# Altium PCB PCB1.PcbDoc (part 1 of 2)
Units mil, origin at the board's own origin, x right, y up, seen from the top; angles counter-clockwise.
Board outline 2301.37 x 4029.64 mil, 2 copper layers (Top Layer, Bottom Layer); 103 components, 112 nets, 474 pads, 173 vias.
Unrouted connection lines stored in the file: 1.
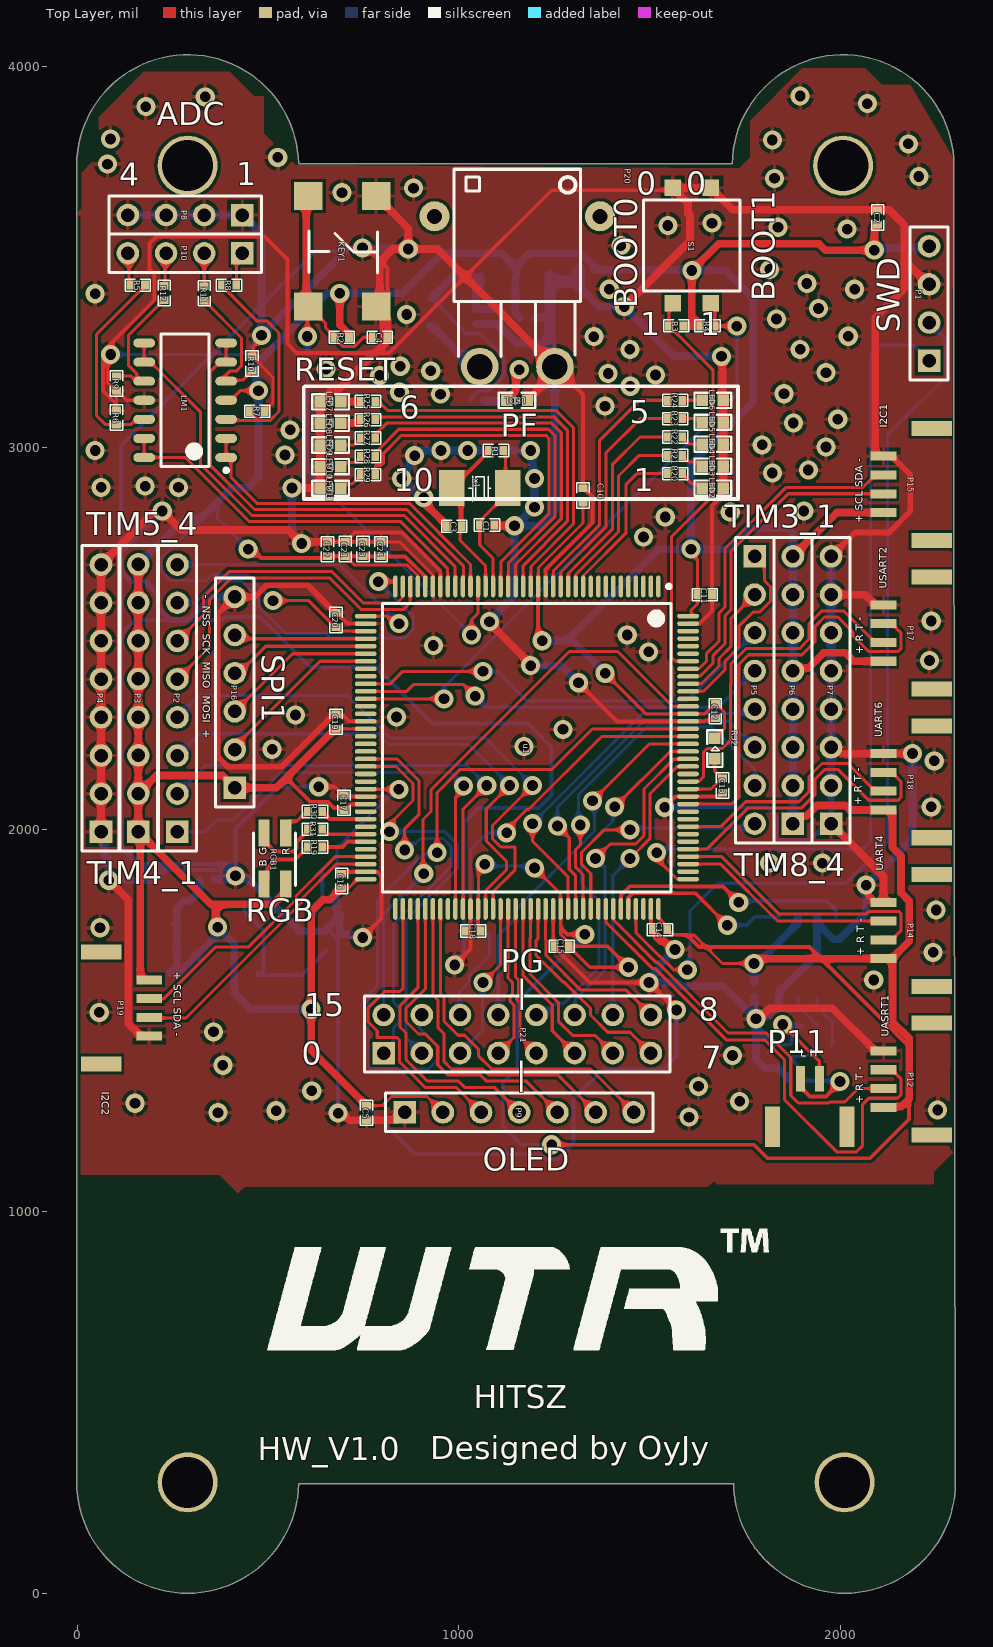
[diagram p0: Top Layer view]
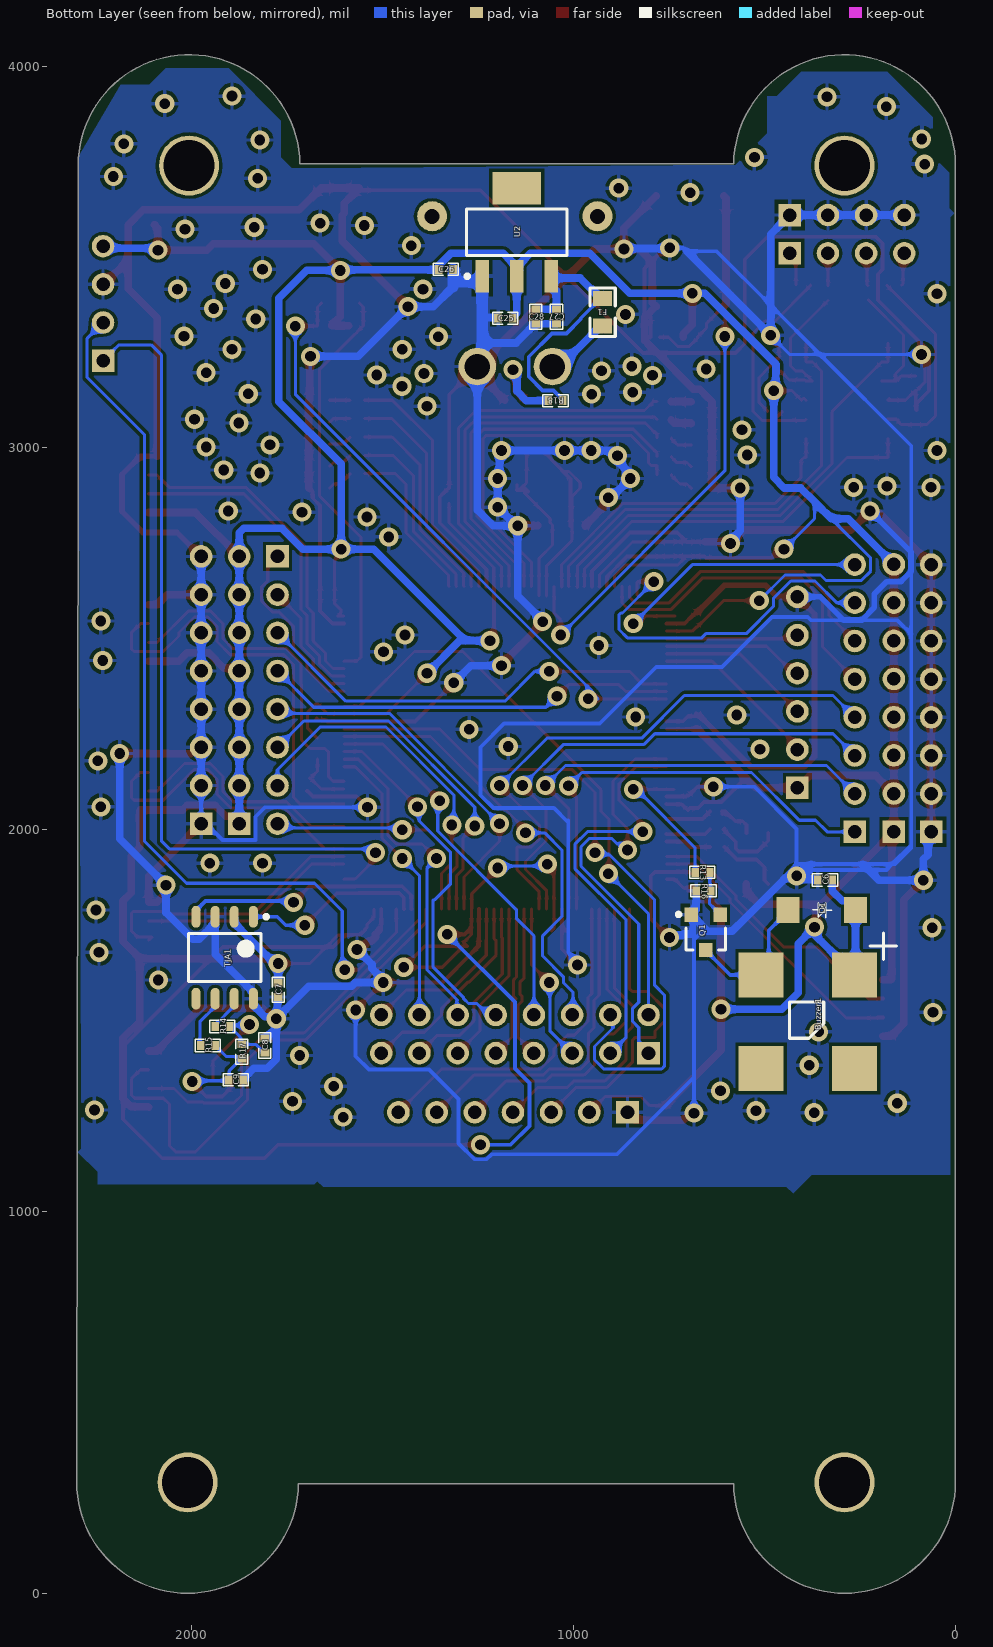
[diagram p1: Bottom Layer view, seen from below]

## Layer stack, top to bottom
Top Solder: solder mask 0.4, Solder Resist, Dk 3.5
Top Layer: signal copper 1.4
Dielectric 1: dielectric 12.6, FR-4, Dk 4.8
Bottom Layer: signal copper 1.4
Bottom Solder: solder mask 0.4, Solder Resist, Dk 3.5

## Board outline
-0.83,3739.27 cw(c289.61,3739.27) 580.02,3744.28 1715.74,3744.28 cw(c2006.15,3739.27) 2296.6,3739.27 2296.6,3046.36 2300.53,290.46 cw(c2295.52,290.45) 2300.53,290.45 cw(c2010.09,290.45) 2010.09,0 cw(c2010.09,290.45) 1719.67,286.37 580.03,286.37 cw(c289.61,290.45) 289.61,0 cw(c289.61,290.45) -0.83,290.45 cw(c4.18,290.45) -0.43,292.42 cw(c4.18,294.39) -0.83,294.39

## Design rules (kind name [scope] priority, off if disabled: settings)
Clearance [All] p1: gap=8 ignorepadtopadclearanceinfootprint=TRUE except(0: Arc-Hole Track-Hole SMDPad-Hole THPad-Hole Via-Hole Fill-Hole Poly-Hole Region-Hole Text-Hole)
ComponentClearance [All] p1 off: gap=10 collisioncheckmode=3 verticalgap=10 showdistances=FALSE
MinimumSolderMaskSliver [All] p1: minsoldermaskwidth=0
PolygonConnect [All] p1: connectstyle=Relief reliefconductorwidth=10 reliefentries=4 polygonreliefangle="90 Angle" airgapwidth=10
RoutingVias [All] p1: holewidth=28 width=50 viastyle="Through Hole" minholewidth=28 minwidth=50 maxholewidth=28 maxwidth=50
SilkToSilkClearance [All] p1: silktosilkclearance=0
SilkToSolderMaskClearance [IsPad] p1: minsilkscreentomaskgap=0 clearancetoexposedcopper=TRUE
SolderMaskExpansion [All] p1: expansion=4
Width [All] p1: maxlimit=100 minlimit=8 preferedwidth=10 minimp=50.000000 maximp=50.000000 favimp=50.000000
26 further rules are at their usual default settings.

## Classes and differential pairs
component class Sheet4: Buzzer1 C6 C7 C8 C9 C10 C11 C12 C13 C14 C15 C16 C17 C18 C19 C20 C21 C22 C23 C24 C25 C26 C27 C28 D1 F1 LED1 LED2 LED3 LED4 LED5 LED6 LED7 LED8 LED9 LED10 LED11 P11 P12 P14 P15 P16 P17 P18 P19 P20 P21 Q1 R13 R14 R15 R16 R17 R18 R19 R20 R21 R22 R23 R24 R25 R26 R27 R28 R29 R30 R31 R32 RGB1 TJA1 U2
component class Sheet3: C1 C2 C3 C4 C5 KEY1 LM1 P1 P2 P3 P4 P5 P6 P7 P8 P9 P10 R1 R2 R3 R4 R5 R6 R7 R8 R9 R10 R11 R12 S1 u1 x1

## Components (designator, comment, footprint, x,y, rotation, side; value= is the part's Value field where it differs from the comment)
Buzzer1 "Buzzer" BUZZER 218,1329.66 r90 bottom
C1 "20PF" 0402 1073.57,2797.73 r0 top
C2 "0.1uf" 0402 2096.7,3603.14 r270 top
C3 "20PF" 0402 988,2794.66 r180 top
C4 "1uf" 0402 793,3289.66 r0 top
C5 "0.1uf" 0402 758,1258.24 r90 top
C6 "10uf" 0402 340.5,1868.28 r180 bottom
C7 "0.1uf" 0402 1772.9,1580.66 r270 bottom
C8 "30pf" 0402 1808,1434.66 r270 bottom
C9 "30pf" 0402 1884,1344.66 r0 bottom
C10 "0.1uf" 0402 1324.91,2875.12 r270 top
C11 "0.1uf" 0402 1644,2615.61 r180 top
C12 "0.1uf" 0402 1671.75,2310.39 r90 top
C13 "0.1uf" 0402 1690.21,2115.66 r90 top
C14 "0.1uf" 0402 1526.87,1738.19 r0 top
C15 "0.1uf" 0402 1269,1694.66 r0 top
C16 "0.1uf" 0402 693,1865.66 r270 top
C17 "0.1uf" 0402 699.31,2070.66 r270 top
C18 "0.1uf" 0402 1037.54,1734.66 r0 top
C19 "0.1uf" 0402 678,2282.87 r270 top
C20 "0.1uf" 0402 678,2549.27 r270 top
C21 "1uf" 0402 702,2734.9 r270 top
C22 "100nf" 0402 655.64,2734.61 r270 top
C23 "100nf" 0402 748.84,2734.9 r270 top
C24 "1uf" 0402 795.8,2734.61 r270 top
C25 "0.1uf" 0402 1178,3339.66 r0 bottom
C26 "10uf" 0402 1334,3467.66 r180 bottom
C27 "0.1uf" 0402 1044.06,3343.66 r270 bottom
C28 "10uf" 0402 1098,3343.66 r270 bottom
D1 "DIODE" DIODE 260.83,1789.66 r0 bottom
F1 "Fuse" 0805 923,3355.66 r270 bottom
KEY1 "Key" 6*6*5轻触开关 694.42,3514.98 r270 top
LED1 "LED" 0603 1152.17,3124.66 r0 top
LED2 "红LED" 0603 1664.92,2894.66 r0 top
LED3 "红LED" 0603 1664.92,2952.14 r0 top
LED4 "红LED" 0603 1664.92,3009.63 r0 top
LED5 "红LED" 0603 1664.92,3067.11 r0 top
LED6 "红LED" 0603 1664.92,3124.6 r0 top
LED7 "绿LED" 0603 664,3120.51 r180 top
LED8 "绿LED" 0603 664,3063.91 r180 top
LED9 "绿LED" 0603 664,3007.32 r180 top
LED10 "绿LED" 0603 664,2950.72 r180 top
LED11 "绿LED" 0603 664,2894.12 r180 top
LM1 "LM324" LM324 283,3124.66 r180 top
P1 "Header 4" HDR1X4 2231.54,3228.24 r90 top
P2 "Header 8" HDR1X8 262.66,1994.17 r90 top
P3 "Header 8" HDR1X8 160.28,1994.66 r90 top
P4 "Header 8" HDR1X8 62.66,1994.17 r90 top
P5 "Header 8" HDR1X8 1774.69,2715.61 r270 top
P6 "Header 8" HDR1X8 1874.69,2015.61 r90 top
P7 "Header 8" HDR1X8 1974.69,2015.61 r90 top
P8 "Header 4" HDR1X4 433,3609.66 r180 top
P9 "Header 7" HDR1X7 858,1259.66 r0 top
P10 "Header 4" HDR1X4 433,3509.66 r180 top
P11 "Header 2" GH1.25_2P 1821.85,1109.46 r0 top
P12 "Header 4" GH1.25_4P 2191.74,1346.56 r90 top
P14 "Header 4" GH1.25_4P 2191.74,1736.01 r90 top
P15 "Header 4" GH1.25_4P 2191.74,2904.31 r90 top
P16 "Header 6" HDR1X6 413,2109.66 r90 top
P17 "Header 4" GH1.25_4P 2191.74,2514.88 r90 top
P18 "Header 4" GH1.25_4P 2191.74,2125.44 r90 top
P19 "Header 4" GH1.25_4P 109.26,1533.01 r270 top
P20 "Header 2" XT30-PW-M 1153,3409.66 r0 top
P21 "Header 8X2" HDR2X8 803,1414.66 r0 top
Q1 "S8050" SOT-23R 653,1735.92 r0 bottom
R1 "1M" 0402 1097,2992.88 r0 top
R2 "10K" 0402 693,3289.66 r0 top
R3 "100K" 0402 1569.09,3319.66 r0 top
R4 "100K" 0402 1651.09,3319.66 r0 top
R5 "100K" 0402 159,3426.16 r0 top
R6 "100K" 0402 103,3079.66 r270 top
R7 "100K" 0402 472,3095.85 r180 top
R8 "100K" 0402 398,3426.16 r0 top
R9 "100K" 0402 103,3168.66 r90 top
R10 "100K" 0402 458,3220.66 r270 top
R11 "100K" 0402 333,3404.66 r90 top
R12 "100K" 0402 228,3405.66 r90 top
R13 "510R" 0402 662,1888.28 r180 bottom
R14 "0R" 0402 1919,1484.66 r180 bottom
R15 "0R" 0402 1957,1434.66 r180 bottom
R16 "10K" 0402 659,1839.66 r180 bottom
R17 "120R" 0402 1868,1418.66 r90 bottom
R18 "560R" 0402 1046.43,3123.66 r0 bottom
R19 "47R" 0402 623,1954.66 r0 top
R20 "1K" 0402 1566.33,2932.38 r180 top
R21 "1K" 0402 1566.33,2980.43 r180 top
R22 "1K" 0402 1566.33,3028.49 r180 top
R23 "1K" 0402 1566.33,3076.54 r180 top
R24 "1K" 0402 1566.33,3124.6 r180 top
R25 "470R" 0402 762,3121.76 r0 top
R26 "470R" 0402 762,3073.71 r0 top
R27 "470R" 0402 762,3025.65 r0 top
R28 "470R" 0402 762,2977.6 r0 top
R29 "470R" 0402 762,2929.54 r0 top
R30 "68R" 0402 623,2047.34 r180 top
R31 "47R" 0402 623,2001.15 r180 top
R32 "0R" 0603 1670.09,2212.13 r90 top
RGB1 "RGB" RGB_LED 518,1924.66 r90 top
S1 "Switch" SWITCH_2P 1610.09,3529.66 r0 top
TJA1 "TJA1050" TJA1050 1913,1664.66 r270 bottom
u1 "STM32F103ZETx" STM32F103ZETx 1178,2214.66 r270 top
U2 "AMS1117-3.3" ASM1117 1148,3564.66 r90 bottom
x1 "8MHz" 8M晶振 1054.57,2894.66 r180 top

## Footprints (in the part's own frame and the unit in brackets; to place one, negate y for a bottom-side part, rotate by r counter-clockwise, add the part's x,y. Pads: shape width x height; smd on the part's side, far side on the other; paste and mask are expansions set on the pad)
6*6*5轻触开关 [mm]
  rect 1.85x1.9 smd: 1(-3.675,2.25) 2(3.675,2.25) 3(-3.675,-2.25) 4(3.675,-2.25)
  silkscreen extent -1.35,-2.23 1.45,2.35
8M晶振 [mm]
  rect 1.7x2.4 smd: 1(-1.85,0) 2(1.85,0)
  silkscreen extent -0.72,-0.78 0.72,0.87, body extent -2.5,-1.6 2.5,1.6, height 0.25
0402 [mil]
  rect 20x23.62 smd: 1(-19,0) 2(19,0)
  silkscreen extent -33,-16 33,16
0603 [mil]
  rect 30x30 smd: 1(-27,0) 2(27.5,-0.06)
  silkscreen extent -48,-20 48,20
0805 [mil]
  rect 39.37x50 smd: 1(-36,0) 2(36,0)
  silkscreen extent -63,-33 64,33
ASM1117 [mm] "SOT223, 4-Leads, Body 6.51x7.00mm (avg), Pitch 2.30mm, IPC Medium Density"
  rect 2.15x0.9 smd: 1(-2.93,2.3) 2(-2.93,0) 3(-2.93,-2.3)
  rect 2.15x3.25 smd: 4(2.93,0)
  silkscreen extent -3.05,-3.35 1.55,3.43, body extent -1.86,-3.35 1.86,3.35, height 1.8
BUZZER [mil]
  rect 118.11x118.11 smd: 1(290,45) 2(290,290) 3(45,290) 4(45,45)
  silkscreen extent 124,-65 400,216
DIODE [mm] "SODFL, 2-Leads, Body 3.63x5.35mm, IPC Medium Density"
  rect 1.52x1.724 smd: 1(0,0) 2(4.5,0)
  silkscreen extent 1.57,-0.5 2.86,0.52
GH1.25_2P [mm]
  rect 1x2.7 smd: 0(0,2.845) 0(4.95,2.845)
  rect 0.6x1.7 smd: 1(1.85,6.045) 2(3.1,6.045)
GH1.25_4P [mm]
  rect 1x2.7 smd: 0(-3.725,-1.175) 0(3.725,-1.175)
  rect 0.6x1.7 smd: 1(-1.875,2.025) 2(-0.625,2.025) 3(0.625,2.025) 4(1.875,2.025)
HDR1X4 [mm] "Connector; Header; 4 Position"
  rect 1.5x1.5 hole 0.9: 1(0,0)
  round 1.5 hole 0.9: 2(2.54,0) 3(5.08,0) 4(7.62,0)
  silkscreen extent -1.27,-1.27 8.89,1.27
HDR1X6 [mm] "Connector; Header; 6 Position"
  rect 1.5x1.5 hole 0.9: 1(0,0)
  round 1.5 hole 0.9: 2(2.54,0) 3(5.08,0) 4(7.62,0) 5(10.16,0) 6(12.7,0)
  silkscreen extent -1.27,-1.27 13.97,1.27
HDR1X7 [mm] "Connector; Header; 7 Position"
  rect 1.5x1.5 hole 0.9: 1(0,0)
  round 1.5 hole 0.9: 2(2.54,0) 3(5.08,0) 4(7.62,0) 5(10.16,0) 6(12.7,0) 7(15.24,0)
  silkscreen extent -1.27,-1.27 16.51,1.27
HDR1X8 [mm] "Connector; Header; 8 Position"
  rect 1.5x1.5 hole 0.9: 1(0,0)
  round 1.5 hole 0.9: 2(2.54,0) 3(5.08,0) 4(7.62,0) 5(10.16,0) 6(12.7,0) 7(15.24,0) 8(17.78,0)
  silkscreen extent -1.27,-1.27 19.05,1.27
HDR2X8 [mm] "Connector; Header; 8x2 Position"
  rect 1.5x1.5 hole 0.9: 1(0,0)
  round 1.5 hole 0.9: 2(0,2.54) 3(2.54,0) 4(2.54,2.54) 5(5.08,0) 6(5.08,2.54) 7(7.62,0) 8(7.62,2.54) 9(10.16,0) 10(10.16,2.54) 11(12.7,0) 12(12.7,2.54) 13(15.24,0) 14(15.24,2.54) 15(17.78,0) 16(17.78,2.54)
  silkscreen extent -1.27,-1.27 19.05,3.81
LM324 [mm] "SOIC, 14-Leads, Body 8.65x3.90mm, Pitch 1.27mm, IPC Medium Density"
  oval 1.45x0.6 smd: 1(-2.725,3.81) 2(-2.725,2.54) 3(-2.725,1.27) 4(-2.725,0) 5(-2.725,-1.27) 6(-2.725,-2.54) 7(-2.725,-3.81) 8(2.725,-3.81) 9(2.725,-2.54) 10(2.725,-1.27) 11(2.725,0) 12(2.725,1.27) 13(2.725,2.54) 14(2.725,3.81)
  silkscreen extent -2.85,-4.4 1.6,4.78, body extent -2,-4.4 2,4.4, height 1.75
RGB_LED [mm]
  rect 1.8x0.75 smd: 1(-1.7,-0.725) 2(-1.7,0.725) 3(1.7,-0.725) 4(1.7,0.725)
  silkscreen extent -1.8,-1.36 1.7,1.44
SOT-23R [mm] "SOT-23; 3 Leads; Body 3.0 x 2.5 mm, inc. leads (LxW max)"
  rect 0.9x0.95 smd: 1(0.95,-1.048) 2(-0.95,-1.048) 3(0,1.302)
  silkscreen extent -1.3,-1.19 1.93,1.3
STM32F103ZETx [mm] "TSQFP, 144-Leads, Body 20.00x20.00mm, Pitch 0.50mm, IPC Medium Density"
  oval 1.45x0.3 smd: 1(-10.725,8.75) 2(-10.725,8.25) 3(-10.725,7.75) 4(-10.725,7.25) 5(-10.725,6.75) 6(-10.725,6.25) 7(-10.725,5.75) 8(-10.725,5.25) 9(-10.725,4.75) 10(-10.725,4.25) 11(-10.725,3.75) 12(-10.725,3.25) 13(-10.725,2.75) 14(-10.725,2.25) 15(-10.725,1.75) 16(-10.725,1.25) 17(-10.725,0.75) 18(-10.725,0.25) 19(-10.725,-0.25) 20(-10.725,-0.75) 21(-10.725,-1.25) 22(-10.725,-1.75) 23(-10.725,-2.25) 24(-10.725,-2.75) 25(-10.725,-3.25) 26(-10.725,-3.75) 27(-10.725,-4.25) 28(-10.725,-4.75) 29(-10.725,-5.25) 30(-10.725,-5.75) 31(-10.725,-6.25) 32(-10.725,-6.75) 33(-10.725,-7.25) 34(-10.725,-7.75) 35(-10.725,-8.25) 36(-10.725,-8.75) 73(10.725,-8.75) 74(10.725,-8.25) 75(10.725,-7.75) 76(10.725,-7.25) 77(10.725,-6.75) 78(10.725,-6.25) 79(10.725,-5.75) 80(10.725,-5.25) 81(10.725,-4.75) 82(10.725,-4.25) 83(10.725,-3.75) 84(10.725,-3.25) 85(10.725,-2.75) 86(10.725,-2.25) 87(10.725,-1.75) 88(10.725,-1.25) 89(10.725,-0.75) 90(10.725,-0.25) 91(10.725,0.25) 92(10.725,0.75) 93(10.725,1.25) 94(10.725,1.75) 95(10.725,2.25) 96(10.725,2.75) 97(10.725,3.25) 98(10.725,3.75) 99(10.725,4.25) 100(10.725,4.75) 101(10.725,5.25) 102(10.725,5.75) 103(10.725,6.25) 104(10.725,6.75) 105(10.725,7.25) 106(10.725,7.75) 107(10.725,8.25) 108(10.725,8.75)
  oval 0.3x1.45 smd: 37(-8.75,-10.725) 38(-8.25,-10.725) 39(-7.75,-10.725) 40(-7.25,-10.725) 41(-6.75,-10.725) 42(-6.25,-10.725) 43(-5.75,-10.725) 44(-5.25,-10.725) 45(-4.75,-10.725) 46(-4.25,-10.725) 47(-3.75,-10.725) 48(-3.25,-10.725) 49(-2.75,-10.725) 50(-2.25,-10.725) 51(-1.75,-10.725) 52(-1.25,-10.725) 53(-0.75,-10.725) 54(-0.25,-10.725) 55(0.25,-10.725) 56(0.75,-10.725) 57(1.25,-10.725) 58(1.75,-10.725) 59(2.25,-10.725) 60(2.75,-10.725) 61(3.25,-10.725) 62(3.75,-10.725) 63(4.25,-10.725) 64(4.75,-10.725) 65(5.25,-10.725) 66(5.75,-10.725) 67(6.25,-10.725) 68(6.75,-10.725) 69(7.25,-10.725) 70(7.75,-10.725) 71(8.25,-10.725) 72(8.75,-10.725) 109(8.75,10.725) 110(8.25,10.725) 111(7.75,10.725) 112(7.25,10.725) 113(6.75,10.725) 114(6.25,10.725) 115(5.75,10.725) 116(5.25,10.725) 117(4.75,10.725) 118(4.25,10.725) 119(3.75,10.725) 120(3.25,10.725) 121(2.75,10.725) 122(2.25,10.725) 123(1.75,10.725) 124(1.25,10.725) 125(0.75,10.725) 126(0.25,10.725) 127(-0.25,10.725) 128(-0.75,10.725) 129(-1.25,10.725) 130(-1.75,10.725) 131(-2.25,10.725) 132(-2.75,10.725) 133(-3.25,10.725) 134(-3.75,10.725) 135(-4.25,10.725) 136(-4.75,10.725) 137(-5.25,10.725) 138(-5.75,10.725) 139(-6.25,10.725) 140(-6.75,10.725) 141(-7.25,10.725) 142(-7.75,10.725) 143(-8.25,10.725) 144(-8.75,10.725)
  silkscreen extent -10.85,-9.6 9.6,9.6, body extent -10,-10 10,10, height 1.6
SWITCH_2P [mm]
  rect 1.1x1.1 smd: 1(-1.27,3.835) 2(-1.27,-3.835) 3(1.27,3.835) 4(1.27,-3.835)
  silkscreen extent -3.2,-3.02 3.2,3.02
TJA1050 [mm] "SOIC, 8-Leads, Body 4.90x3.90mm, Pitch 1.27mm, IPC Medium Density"
  oval 1.45x0.6 smd: 1(-2.725,1.905) 2(-2.725,0.635) 3(-2.725,-0.635) 4(-2.725,-1.905) 5(2.725,-1.905) 6(2.725,-0.635) 7(2.725,0.635) 8(2.725,1.905)
  silkscreen extent -2.85,-2.4 1.6,2.88, body extent -2,-2.4 2,2.4, height 1.75
XT30-PW-M [mm]
  round 2 hole 1: 0(-5.5,5) 0(5.5,5)
  round 2.5 hole 1.7: 1(-2.5,-5) 2(2.5,-5)
  silkscreen extent -4.22,-4.34 4.19,8.13

## Part data
C1 C2 C3 C4 C5 C6 C7 C8 C9 C10 C11 C12 C13 C14 C15 C16 C17 C18 C19 C20 C21 C22 C23 C24 C25 C26 C27 C28: library part C
LED2 LED3 LED4 LED5 LED6 LED7 LED8 LED9 LED10 LED11: library part LED
P1 P8 P10 P12 P14 P15 P17 P18 P19: "Header, 4-Pin", LatestRevisionDate=17-Jul-2002, LatestRevisionNote="Re-released for DXP Platform.", Publisher="Altium Limited"
P2 P3 P4 P5 P6 P7: "Header, 8-Pin", LatestRevisionDate=17-Jul-2002, LatestRevisionNote="Re-released for DXP Platform.", Publisher="Altium Limited"
P9: "Header, 7-Pin", LatestRevisionDate=17-Jul-2002, LatestRevisionNote="Re-released for DXP Platform.", Publisher="Altium Limited"
P11 P20: "Header, 2-Pin", LatestRevisionDate=17-Jul-2002, LatestRevisionNote="Re-released for DXP Platform.", Publisher="Altium Limited"
P16: "Header, 6-Pin", LatestRevisionDate=17-Jul-2002, LatestRevisionNote="Re-released for DXP Platform.", Publisher="Altium Limited"
P21: "Header, 8-Pin, Dual row", LatestRevisionDate=17-Jul-2002, LatestRevisionNote="Re-released for DXP Platform.", Publisher="Altium Limited"
Q1: library part NPN, "8050/BCW846/BCW847"
R1 R2 R3 R4 R5 R6 R7 R8 R9 R10 R11 R12 R13 R14 R15 R16 R17 R18 R19 R20 R21 R22 R23 R24 R25 R26 R27 R28 R29 R30 R31 R32: library part R
x1: library part XTAL_8MHz

## Free pads (board coordinates)
  round 157.48 hole 133.86: 2(2006.15,3739.27) 3(289.61,3739.27) 4(289.61,290.45) 5(2010.09,290.45)

## Via types
v1: diameter 50, hole 28, Top Layer to Bottom Layer, 173 vias

## Nets (pads, with @x,y where several pads share a name; then routed paths per layer and width w, separated by ;. In a path a pad name is that pad's centre, name@x,y a point inside that pad or via, vN(x,y) a via of type N, cw(c..) or ccw(c..) an arc to the next point about the centre after c; other vN are vias at no path point)
ADC1_IN10: LM1.1 LM1.2 u1.26 | length 891.2
  Top Layer w8: LM1.2@390.28,3024.66 LM1.1@390.28,2974.66 395.8,2974.66 403.02,2967.44 403.02,2922.84 471.19,2854.66 870.67,2854.66 947,2778.33 947,2777.88 1030.36,2694.52 1030.36,2655.39 u1.26@1029.63,2654.66
  Top Layer w10: u1.26@1029.63,2654.66 1030.36,2654.66 u1.26@1030.36,2636.9
ADC1_IN11: LM1.6 LM1.7 u1.27 | length 1174.4
  Top Layer w8: LM1.7@390.28,3274.66 LM1.6@390.28,3224.66 373.55,3224.66 349.74,3200.85 349.74,2953.48 464.56,2838.66 863.59,2838.66 1012.46,2689.79 1012.46,2636.9 u1.27@1010.68,2636.9
ADC1_IN12: LM1.8 LM1.9 u1.28 | length 1223.3
  Top Layer w8: LM1.8@175.72,3274.66 LM1.9@175.72,3224.66 192.45,3224.66 322.72,3094.39 322.72,2957.88 457.94,2822.66 856.79,2822.66 989.21,2690.24 989.21,2634.66 u1.28@990.99,2636.9
ADC1_IN13: LM1.13 LM1.14 u1.29 | length 1012.4
  Top Layer w8: LM1.13@175.72,3024.66 LM1.14@175.72,2974.66 283.31,2974.66 451.31,2806.66 847.56,2806.66 970.58,2683.64 970.58,2637.63 u1.29@971.31,2636.9
ADC_CH1: P10.1 R8.2 | length 90.1
  Top Layer w8: R8.2@417,3426.16 417,3493.66 P10.1@433,3509.66
ADC_CH2: P10.2 R11.2 | length 86
  Top Layer w8: R11.2@333,3423.66 P10.2@333,3509.66
ADC_CH3: P10.3 R12.2 | length 87.1
  Top Layer w8: R12.2@228,3424.66 230.5,3427.16 230.5,3507.16 P10.3@233,3509.66
ADC_CH4: P10.4 R5.1 | length 86.4
  Top Layer w8: P10.4@133,3509.66 136.5,3506.16 136.5,3429.66 R5.1@140,3426.16
BOOT0: R3.1 S1.2 u1.138 | length 1072.4
  Top Layer w8: S1.2@1560.09,3378.68 1550.09,3368.68 1550.09,3321.88 R3.1@1550.09,3319.66 1566.09,3303.66 1566.09,3302.88 1573.12,3295.85 1573.9,3295.85 1664.92,3204.83 1664.92,2874.69 1556.47,2766.24 1556.47,2451.52 1566.22,2441.77 1599.52,2441.77 u1.138@1600.24,2441.04
BOOT1: R4.2 S1.4 u1.48 | length 1655.9
  Top Layer w8: u1.48@755.76,2342.61 v1(961,2342.61) ; S1.4@1660.09,3378.68 1670.09,3368.68 R4.2@1670.09,3319.66 1670.61,3319.14 1727.48,3319.14 v1(1728,3318.61)
  Bottom Layer w8: v1(961,2342.61) 935.95,2342.61 948.48,2355.14 948.48,2360.47 1728,3139.99 v1(1728,3318.61)
Buzzer: R13.1 u1.60 | length 396.9
  Top Layer w8: u1.60@736,2105.66 755.03,2105.66 u1.60@755.76,2106.39 756.49,2105.66 v1(842.79,2105.66)
  Bottom Layer w8: R13.1@681,1888.28 681,1952.61 834.05,2105.66 v1(842.79,2105.66)
CAN_RX: TJA1.4 u1.103 | length 655.5
  Top Layer w10: u1.103@1424.06,1792.42 1424.41,1792.76 1424.41,1828.22 1448.15,1851.96 1569.08,1851.96 1569.78,1851.27 1691.39,1851.27 v1(1733,1809.66)
  Bottom Layer w10: v1(1733,1809.66) 1736.83,1813.49 1963.19,1813.49 1988,1788.68 TJA1.4@1988,1771.94
CAN_TX: TJA1.1 u1.104 | length 473
  Top Layer w10: u1.104@1443.75,1792.42 1444.09,1792.76 1444.09,1822.45 1455.6,1833.96 1561.63,1833.96 1562.32,1833.27 1619.39,1833.27 v1(1703,1749.66)
  Bottom Layer w10: v1(1703,1749.66) 1753,1749.66 1775.28,1771.94 TJA1.1@1838,1771.94
CANH: C8.2 P11.2 R14.2 R17.2 | length 368.9
  Top Layer w8: v1(1848,1489.66) 1943.9,1393.76 P11.2@1943.9,1347.44
  Bottom Layer w8: C8.2@1808,1415.66 1809.81,1415.66 1831.81,1437.66 R17.2@1868,1437.66 1871.5,1441.16 1871.5,1456.16 R14.2@1890,1474.66 ; v1(1848,1489.66) 1850.5,1487.16 1897.5,1487.16 R14.2@1900,1484.66
  Bottom Layer w10: R14.2@1890,1474.66 1890,1480.66 1894,1484.66 R14.2@1900,1484.66
CANL: C9.2 P11.1 R15.2 R17.1 | length 409.3
  Top Layer w10: P11.1@1894.69,1347.44 1894.69,1325.79 1919.5,1300.98 1961.09,1300.98 1998.24,1338.12 v1(1998.24,1340.55) v1@1998.24,1347.39
  Bottom Layer w8: C9.2@1901,1346.66 1901,1368.47 1869.81,1399.66 R17.1@1868,1399.66 1874,1405.66 1909,1405.66 R15.2@1938,1434.66
  Bottom Layer w10: C9.2@1903,1344.66 1905.05,1342.61 1996.18,1342.61 v1(1998.24,1340.55)
CS: P9.7 u1.79 | length 904.3
  Top Layer w8: u1.79@951.62,1792.42 951.62,1570.02 961.47,1560.17 961.47,1497.46 997.45,1461.48 1014.91,1461.48 1050.88,1425.51 1050.88,1408.05 1085.8,1373.13 1344.53,1373.13 P9.7@1458,1259.66
DC: P9.6 u1.78 | length 863.8
  Top Layer w8: u1.78@931.94,1792.42 931.94,1567.08 945.47,1553.54 945.47,1480.92 960.53,1465.87 960.53,1393.25 980.64,1373.13 1063.17,1373.13 1079.17,1357.13 1260.53,1357.13 P9.6@1358,1259.66
EXIT0: P21.1 u1.56 | length 1130.8
  Top Layer w8: u1.56@755.76,2185.13 838.28,2185.13 895.79,2127.62 895.79,2040.12 858,2002.33 v1(858,1946.61)
  Bottom Layer w8: P21.1@803,1414.66 828.53,1440.19 828.53,1481.46 844.53,1497.46 844.53,1531.86 828.53,1547.86 828.53,1752.86 980,1904.33 980,1954.99 958.33,1976.66 899.11,1976.66 886.11,1963.66 875.05,1963.66 v1(858,1946.61)
EXIT1: P21.3 u1.57 | length 1105.9
  Top Layer w8: u1.57@755.76,2165.45 835.33,2165.45 879.79,2120.99 879.79,2076.45 818,2014.66 v1(818,1994.66)
  Bottom Layer w8: v1(818,1994.66) 962.95,1994.66 996,1961.61 996,1897.71 861.47,1763.18 861.47,1456.19 P21.3@903,1414.66
EXIT2: P21.5 u1.87 | length 421.7
  Top Layer w8: v1(1063,1599.66) 1109.1,1645.76 u1.87@1109.1,1792.42
  Bottom Layer w8: P21.5@1003,1414.66 1061.47,1473.13 1061.47,1598.13 v1(1063,1599.66)
EXIT3: P21.7 u1.88 | length 406.4
  Top Layer w8: P21.7@1103,1414.66 1144.53,1456.19 1144.53,1540.3 1134.38,1550.46 1134.38,1563.71 1140,1569.33 1140,1599.99 1128.53,1611.46 1128.53,1792.16 u1.88@1128.79,1792.42
EXIT4: P21.9 u1.89 | length 405
  Top Layer w8: u1.89@1148.47,1792.42 1148.47,1614.14 1156,1606.61 1156,1562.71 1150.38,1557.08 1160.53,1546.93 1160.53,1457.13 P21.9@1203,1414.66
EXIT5: P21.11 u1.90 | length 433.6
  Top Layer w8: u1.90@1168.16,1792.42 1168.16,1617.08 1244.53,1540.71 1244.53,1473.13 P21.11@1303,1414.66
EXIT6: P21.13 u1.91 | length 502.8
  Top Layer w8: u1.91@1187.84,1792.42 1187.84,1717.61 1186,1715.76 1186,1621.87 1260.53,1547.34 1260.53,1498.4 1297.51,1461.42 1356.24,1461.42 P21.13@1403,1414.66
EXIT7: P21.15 u1.92 | length 541
  Top Layer w8: u1.92@1207.53,1792.42 1207.53,1714.66 1202,1709.14 1202,1671.25 1271.7,1601.56 1274.83,1601.56 1344.53,1531.86 1344.53,1514.4 1389.51,1469.42 1448.24,1469.42 P21.15@1503,1414.66
EXIT8: P21.16 u1.93 | length 461.5
  Top Layer w8: u1.93@1227.21,1792.42 1227.21,1712.23 1228,1711.44 1228,1671.02 1319.36,1579.66 1438,1579.66 P21.16@1503,1514.66
EXIT9: P21.14 u1.124 | length 749.1
  Top Layer w8: v1(1448,1924.66) 1501,1977.66 1501,2094.48 1571.24,2164.72 1599.52,2164.72 u1.124@1600.24,2165.45
  Bottom Layer w8: P21.14@1403,1514.66 1403,1879.66 v1(1448,1924.66)
EXIT10: P21.12 u1.125 | length 876.8
  Top Layer w8: v1(1358,1924.66) 1396,1962.66 1463.33,1962.66 1485,1984.33 1485,2106.53 1562.87,2184.4 1599.52,2184.4 u1.125@1600.24,2185.13
  Bottom Layer w8: P21.12@1303,1514.66 1303,1536.17 1304.86,1538.03 1304.86,1551.29 1303,1553.15 1383,1633.15 1383,1899.66 v1(1358,1924.66)
EXIT11: P21.10 u1.126 | length 947.6
  Top Layer w8: v1(1408,2059.66) 1553.16,2204.82 u1.126@1600.24,2204.82
  Bottom Layer w8: P21.10@1203,1514.66 1222.72,1514.66 1252.72,1544.66 1274.27,1544.66 1285.8,1556.19 1287,1556.19 1287,1559.77 1367,1639.77 1367,1816.22 1363,1816.22 1321,1858.22 1321,1939.99 1403.67,2022.66 1403.67,2055.33 v1(1408,2059.66)
EXIT12: P21.8 u1.127 | length 979.6
  Top Layer w8: v1(1349.72,2075.43) 1498.79,2224.5 u1.127@1600.24,2224.5
  Bottom Layer w8: P21.8@1103,1514.66 1103,1722.03 1149,1768.03 1149,1790.61 1355,1996.61 1355,2070.15 v1(1349.72,2075.43)
EXIT13: P21.6 u1.128 | length 1185.4
  Top Layer w8: v1(1125.17,1991.59) 1125.17,2000.1 1177.67,2052.61 1182.33,2052.61 1373.91,2244.19 u1.128@1600.24,2244.19
  Bottom Layer w8: P21.6@1003,1514.66 1000.5,1517.16 1000.5,1574.41 1026,1599.91 1026,1614.99 1080.34,1669.33 1080.34,1722 1030,1772.35 1030,1946.66 1074.93,1991.59 v1(1125.17,1991.59)
EXIT14: P21.4 u1.129 | length 1873.9
  Top Layer w8: v1(943,1939.66) 943,2097.53 1002.6,2157.13 1242.75,2157.13 1349.48,2263.87 u1.129@1600.24,2263.87
  Bottom Layer w8: P21.4@903,1514.66 896,1507.66 896,1480.39 944.53,1431.86 944.53,1397.46 920.2,1373.13 768.5,1373.13 761.47,1380.16 761.47,1567.02 787,1592.55 787,1815.99 871,1899.99 906,1934.99 938.33,1934.99 v1(943,1939.66)
EXIT15: P21.2 u1.132 | length 1525.3
  Top Layer w8: v1(908,1884.66) 906,1886.66 906,2026.74 927,2047.74 927,2104.16 1289.3,2466.46 1415.69,2466.46 1559.22,2322.93 u1.132@1600.24,2322.93
  Bottom Layer w8: P21.2@803,1514.66 803,1779.66 v1(908,1884.66)